# Altium PCB CBCM test PCB.PcbDoc
Units mm, origin at the board's own origin, x right, y up, seen from the top; angles counter-clockwise.
Board outline 163.32 x 88.65 mm, 4 copper layers (Top Layer, Power, Ground, Bottom Layer), stack 0.778 mm thick; 99 components, 88 nets, 492 pads, 98 vias.
Unrouted connection lines stored in the file: 4.
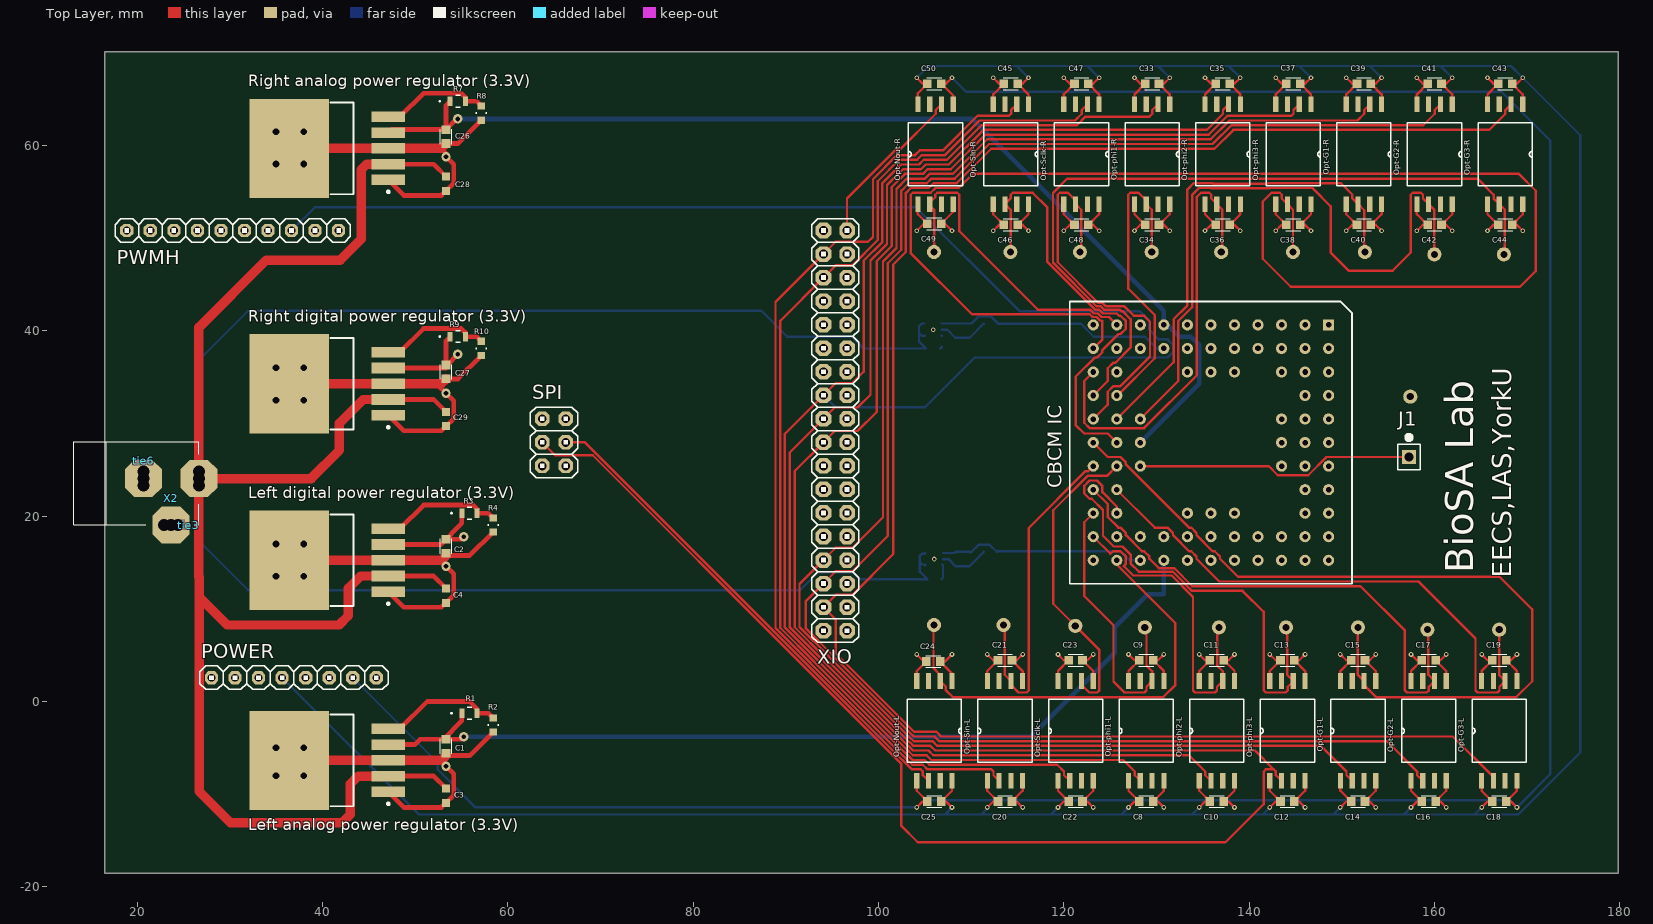
[diagram p0: Top Layer view]
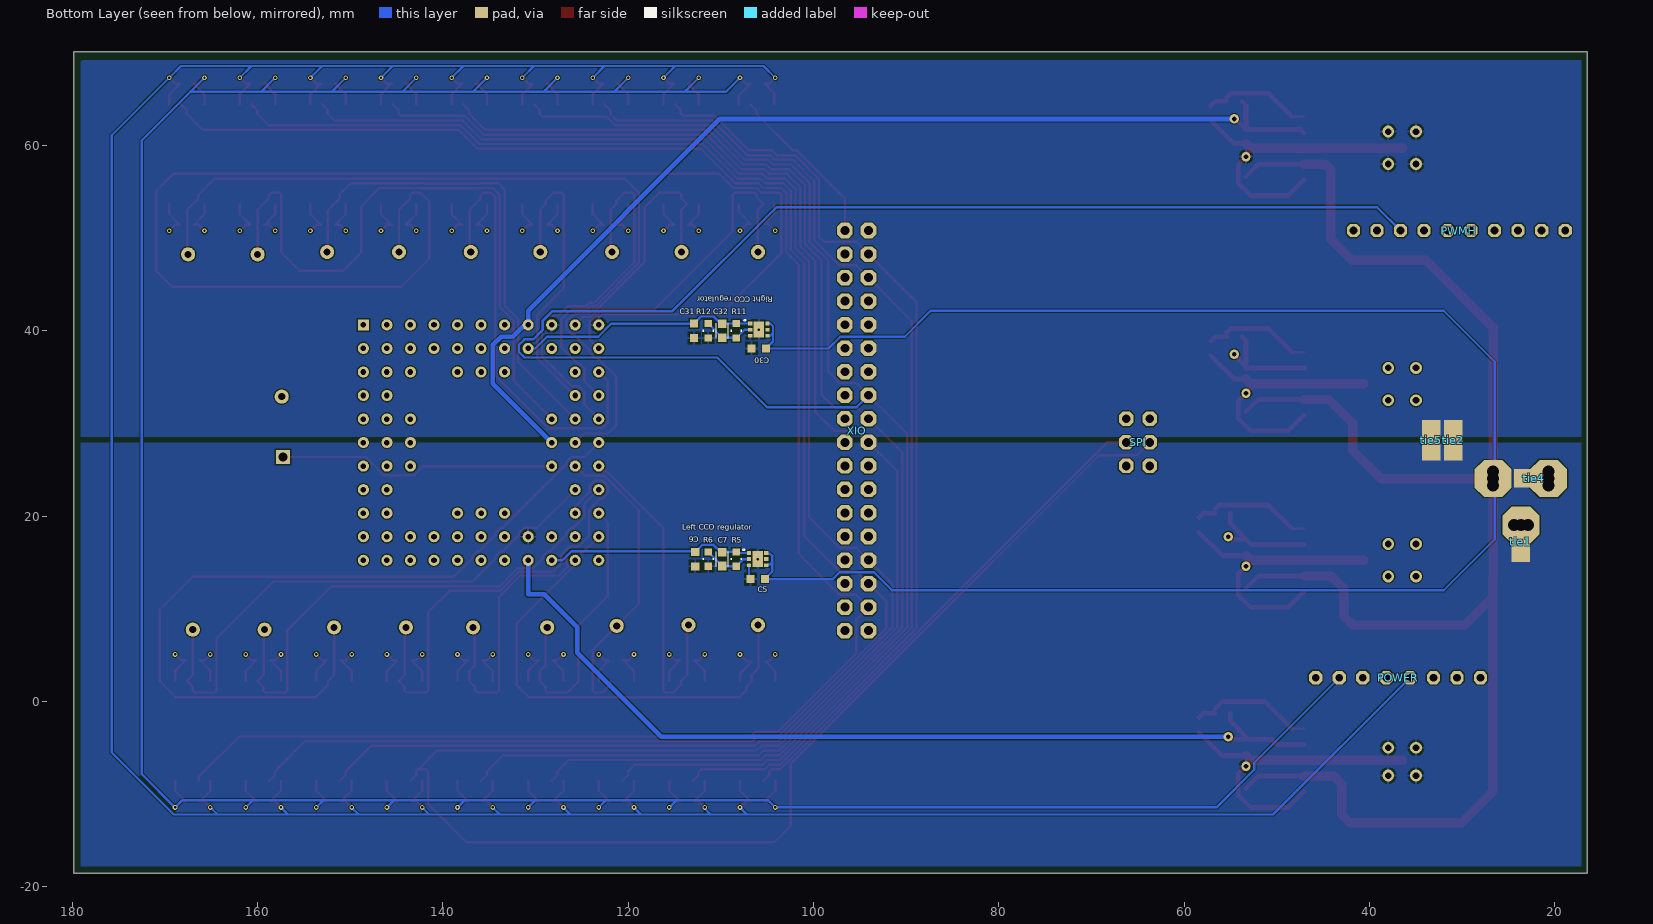
[diagram p1: Bottom Layer view, seen from below]
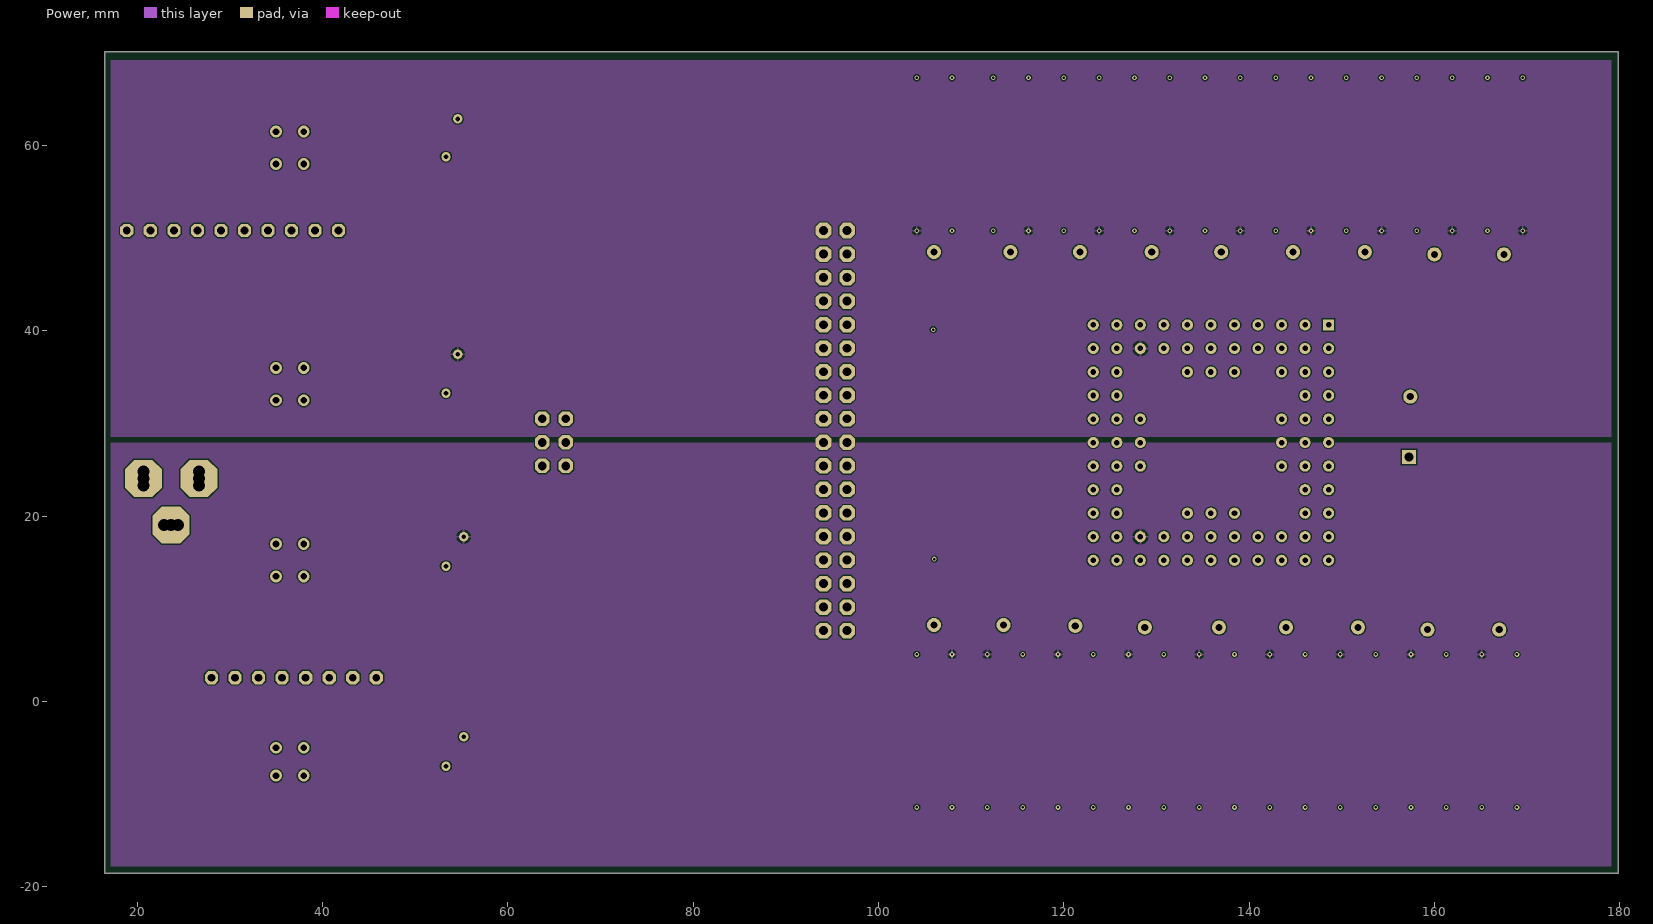
[diagram p2: Power]
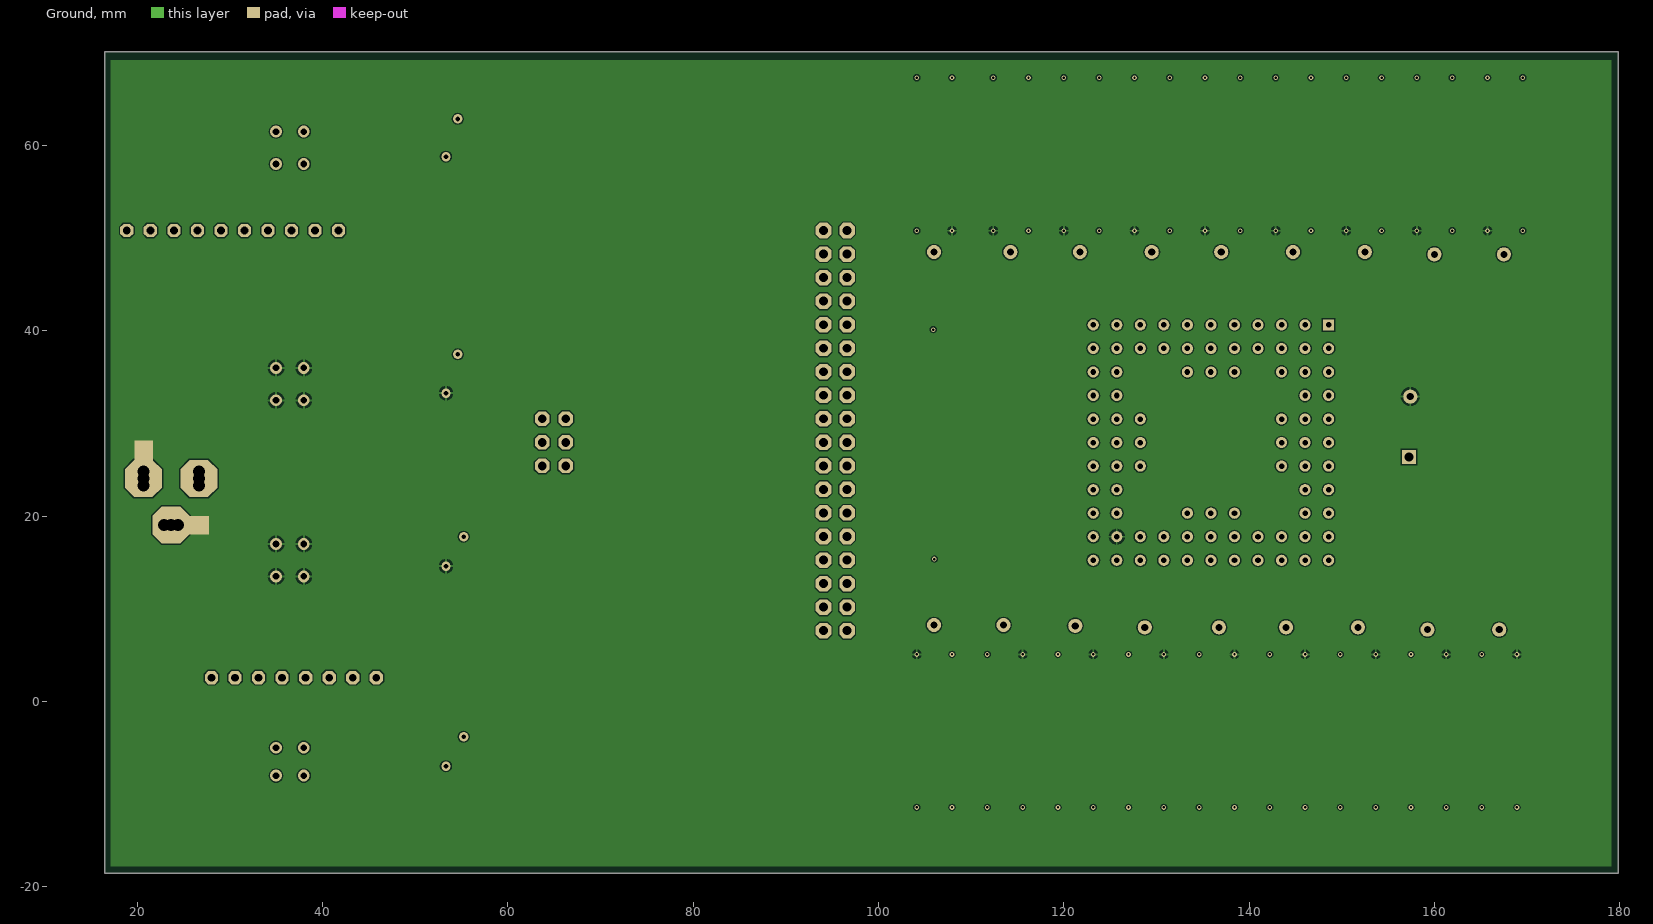
[diagram p3: Ground]

## Layer stack, top to bottom
Top Solder: solder mask 0.0102, Solder Resist, Dk 3.5
Top Layer: signal copper 0.0356
Dielectric 1: core 0.254, FR-4, Dk 4.2
Power: signal copper 0.036
Dielectric 3: prepreg 0.127, Dk 4.2
Ground: signal copper 0.036
Dielectric 2: core 0.254, FR-4, Dk 4.2
Bottom Layer: signal copper 0.0356
Bottom Solder: solder mask 0.0102, Solder Resist, Dk 3.5

## Board outline
16.51,-18.542 16.51,70.104 179.832,70.104 179.832,-18.542

## Design rules (kind name [scope] priority, off if disabled: settings)
Clearance [All] p1: gap=0.127
ComponentClearance [All] p1: gap=0.127 collisioncheckmode=3 verticalgap=0.127 showdistances=FALSE
PolygonConnect [All] p1: connectstyle=Relief reliefconductorwidth=0.254 reliefentries=4 polygonreliefangle="90 Angle" airgapwidth=0.254
RoutingVias [All] p1: holewidth=0.711 width=1.27 viastyle="Through Hole" minholewidth=0.127 minwidth=0.254 maxholewidth=0.711 maxwidth=1.27
SolderMaskExpansion [All] p1: expansion=0.102
Width [All] p1: maxlimit=5 minlimit=0.127 preferedwidth=0.254
28 further rules are at their usual default settings.

## Classes and differential pairs
component class "IC right": C26 C27 C28 C29 C30 C31 C32 C33 C34 C35 C36 C37 C38 C39 C40 C41 C42 C43 C44 C45 C46 C47 C48 C49 C50 Opt-G1-R Opt-G2-R Opt-G3-R Opt-Nout-R Opt-phi1-R Opt-phi2-R Opt-phi3-R Opt-Sclk-R Opt-Sin-R R7 R8 R9 R10 R11 R12 "Right analog power regulator (3.3V)" "Right CCO regulator" "Right digital power regulator (3.3V)"
component class "IC left": C1 C2 C3 C4 C5 C6 C7 C8 C9 C10 C11 C12 C13 C14 C15 C16 C17 C18 C19 C20 C21 C22 C23 C24 C25 "Left analog power regulator (3.3V)" "Left CCO regulator" "Left digital power regulator (3.3V)" Opt-G1-L Opt-G2-L Opt-G3-L Opt-Nout-L Opt-phi1-L Opt-phi2-L Opt-phi3-L Opt-Sclk-L Opt-Sin-L R1 R2 R3 R4 R5 R6
component class "IC common": "CBCM IC" J1 POWER PWMH SPI tie1 tie2 tie3 tie4 tie5 tie6 X2 XIO

## Components (designator, comment, footprint, x,y, rotation, side; value= is the part's Value field where it differs from the comment)
C1 "C" CAPC1608X9N 53.34,-4.826 r90 top
C2 "C" CAPC1608X9N 53.34,16.764 r90 top
C3 "C" CAP_GRM_188 53.34,-10.16 r90 top
C4 "C" CAP_GRM_188 53.34,11.43 r90 top
C5 "C" CAP_GRM_188 106.045,13.208 r180 bottom
C6 "C" CAP_GRM_188 112.776,15.367 r90 bottom
C7 "C" CAPC1608X9N 109.855,15.367 r270 bottom
C8 "C" CAPC1608X9N 128.905,-10.795 r0 top
C9 "C" CAPC1608X9N 128.905,4.445 r0 top
C10 "C" CAPC1608X9N 136.525,-10.795 r0 top
C11 "C" CAPC1608X9N 136.525,4.445 r0 top
C12 "C" CAPC1608X9N 144.145,-10.795 r0 top
C13 "C" CAPC1608X9N 144.145,4.445 r0 top
C14 "C" CAPC1608X9N 151.765,-10.795 r0 top
C15 "C" CAPC1608X9N 151.765,4.445 r0 top
C16 "C" CAPC1608X9N 159.385,-10.795 r0 top
C17 "C" CAPC1608X9N 159.385,4.445 r0 top
C18 "C" CAPC1608X9N 167.005,-10.795 r0 top
C19 "C" CAPC1608X9N 167.005,4.445 r0 top
C20 "C" CAPC1608X9N 113.665,-10.795 r0 top
C21 "C" CAPC1608X9N 113.665,4.445 r0 top
C22 "C" CAPC1608X9N 121.285,-10.795 r0 top
C23 "C" CAPC1608X9N 121.285,4.445 r0 top
C24 "C" CAPC1608X9N 105.918,4.318 r180 top
C25 "C" CAPC1608X9N 106.045,-10.795 r180 top
C26 "C" CAPC1608X9N 53.34,60.96 r90 top
C27 "C" CAPC1608X9N 53.34,35.56 r90 top
C28 "C" CAP_GRM_188 53.34,55.88 r90 top
C29 "C" CAP_GRM_188 53.34,30.48 r90 top
C30 "C" CAP_GRM_188 105.918,38.1 r180 bottom
C31 "C" CAP_GRM_188 112.903,40.005 r90 bottom
C32 "C" CAPC1608X9N 109.855,40.005 r270 bottom
C33 "C" CAPC1608X9N 129.54,66.675 r180 top
C34 "C" CAPC1608X9N 129.54,51.435 r180 top
C35 "C" CAPC1608X9N 137.16,66.675 r180 top
C36 "C" CAPC1608X9N 137.16,51.435 r180 top
C37 "C" CAPC1608X9N 144.78,66.675 r180 top
C38 "C" CAPC1608X9N 144.78,51.435 r180 top
C39 "C" CAPC1608X9N 152.4,66.675 r180 top
C40 "C" CAPC1608X9N 152.4,51.435 r180 top
C41 "C" CAPC1608X9N 160.02,66.675 r180 top
C42 "C" CAPC1608X9N 160.02,51.435 r180 top
C43 "C" CAPC1608X9N 167.64,66.675 r180 top
C44 "C" CAPC1608X9N 167.64,51.435 r180 top
C45 "C" CAPC1608X9N 114.3,66.675 r180 top
C46 "C" CAPC1608X9N 114.3,51.435 r180 top
C47 "C" CAPC1608X9N 121.92,66.675 r180 top
C48 "C" CAPC1608X9N 121.92,51.435 r180 top
C49 "C" CAPC1608X9N 106.045,51.562 r0 top
C50 "C" CAPC1608X9N 106.045,66.675 r0 top
"CBCM IC" "CBCM IC" PGA85x11 148.59,40.64 r270 top
J1 "87224-1" 87224-1 157.261,26.381 r0 top
"Left analog power regulator (3.3V)" "TPS75901KTTR" TO-263-5 40.64,-6.35 r180 top
"Left CCO regulator" "NCP705MTADJTCG" WDFN6 106.045,15.367 r270 bottom
"Left digital power regulator (3.3V)" "TPS75901KTTR" TO-263-5 40.64,15.24 r180 top
Opt-G1-L "ADUM210N1BRIZ" SOIC127P1150X330-8N 151.765,-3.175 r90 top
Opt-G1-R "ADUM210N1BRIZ" SOIC127P1150X330-8N 152.4,59.055 r270 top
Opt-G2-L "ADUM210N1BRIZ" SOIC127P1150X330-8N 159.385,-3.175 r90 top
Opt-G2-R "ADUM210N1BRIZ" SOIC127P1150X330-8N 160.02,59.055 r270 top
Opt-G3-L "ADUM210N1BRIZ" SOIC127P1150X330-8N 167.005,-3.175 r90 top
Opt-G3-R "ADUM210N1BRIZ" SOIC127P1150X330-8N 167.64,59.055 r270 top
Opt-Nout-L "ADUM210N1BRIZ" SOIC127P1150X330-8N 106.045,-3.175 r270 top
Opt-Nout-R "ADUM210N1BRIZ" SOIC127P1150X330-8N 106.172,59.055 r90 top
Opt-phi1-L "ADUM210N1BRIZ" SOIC127P1150X330-8N 128.905,-3.175 r90 top
Opt-phi1-R "ADUM210N1BRIZ" SOIC127P1150X330-8N 129.54,59.055 r270 top
Opt-phi2-L "ADUM210N1BRIZ" SOIC127P1150X330-8N 136.525,-3.175 r90 top
Opt-phi2-R "ADUM210N1BRIZ" SOIC127P1150X330-8N 137.16,59.055 r270 top
Opt-phi3-L "ADUM210N1BRIZ" SOIC127P1150X330-8N 144.145,-3.175 r90 top
Opt-phi3-R "ADUM210N1BRIZ" SOIC127P1150X330-8N 144.78,59.055 r270 top
Opt-Sclk-L "ADUM210N1BRIZ" SOIC127P1150X330-8N 121.285,-3.175 r90 top
Opt-Sclk-R "ADUM210N1BRIZ" SOIC127P1150X330-8N 121.92,59.055 r270 top
Opt-Sin-L "ADUM210N1BRIZ" SOIC127P1150X330-8N 113.665,-3.175 r90 top
Opt-Sin-R "ADUM210N1BRIZ" SOIC127P1150X330-8N 114.3,59.055 r270 top
POWER "8x1F-H8.5" 1X08 36.928,2.565 r0 bottom locked
PWMH "10x1F-H8.5" 1X10 30.324,50.825 r180 bottom locked
R1 "R" RES_0816 55.88,-1.27 r0 top
R2 "R" RC0603N 58.42,-2.54 r270 top
R3 "R" RES_0816 55.88,20.32 r0 top
R4 "R" RC0603N 58.42,19.05 r270 top
R5 "R" RC0603N 108.331,15.367 r270 bottom
R6 "R" RC0603N 111.379,15.367 r270 bottom
R7 "R" RES_0816 54.61,64.77 r0 top
R8 "R" RC0603N 57.15,63.5 r270 top
R9 "R" RES_0816 54.61,39.37 r0 top
R10 "R" RC0603N 57.15,38.1 r270 top
R11 "R" RC0603N 108.331,40.005 r270 bottom
R12 "R" RC0603N 111.379,40.005 r270 bottom
"Right analog power regulator (3.3V)" "TPS75901KTTR" TO-263-5 40.64,59.69 r180 top
"Right CCO regulator" "NCP705MTADJTCG" WDFN6 105.918,40.132 r270 bottom
"Right digital power regulator (3.3V)" "TPS75901KTTR" TO-263-5 40.64,34.29 r180 top
SPI "3x2M" 2X03 64.995,27.965 r270 bottom locked
tie1 "Net Tie" net_tie#1 23.673,16.916 r90 bottom net-tie
tie2 "Net Tie" net_tie#1 31,28.5 r270 bottom net-tie
tie3 "Net Tie" net_tie#2 25.9,19 r180 top net-tie
tie4 "Net Tie" net_tie#1 21.9,24.1 r0 bottom net-tie
tie5 "Net Tie" net_tie#1 33.325,27.889 r90 bottom net-tie
tie6 "Net Tie" net_tie#2 20.7,26.3 r270 top net-tie
X2 "*" POWERSUPPLY_DC-21MM 20.32,24.13 r90 top
XIO "18x2F-H8.5" 2X18 95.348,29.235 r270 bottom locked

## Footprints (in the part's own frame and the unit in brackets; to place one, negate y for a bottom-side part, rotate by r counter-clockwise, add the part's x,y. Pads: shape width x height; smd on the part's side, far side on the other; paste and mask are expansions set on the pad)
1X08 [mil]
  oct 56x56 hole 33.46: 1(-350,0) 2(-250,0) 3(-150,0) 4(-50,0) 5(50,0) 6(150,0) 7(250,0) 8(350,0)
1X10 [mil]
  oct 56x56 hole 33.46: 1(-450,0) 2(-350,0) 3(-250,0) 4(-150,0) 5(-50,0) 6(50,0) 7(150,0) 8(250,0) 9(350,0) 10(450,0)
2X03 [mm]
  oct 1.55x1.55 hole 0.95: 1(-2.54,1.27) 2(-2.54,-1.27) 3(0,1.27) 4(0,-1.27) 5(2.54,1.27) 6(2.54,-1.27)
2X18 [mil]
  oct 66x66 hole 37.4: 1(-850,50) 2(-850,-50) 3(-750,50) 4(-750,-50) 5(-650,50) 6(-650,-50) 7(-550,50) 8(-550,-50) 9(-450,50) 10(-450,-50) 11(-350,50) 12(-350,-50) 13(-250,50) 14(-250,-50) 15(-150,50) 16(-150,-50) 17(-50,50) 18(-50,-50) 19(50,50) 20(50,-50) 21(150,50) 22(150,-50) 23(250,50) 24(250,-50) 25(350,50) 26(350,-50) 27(450,50) 28(450,-50) 29(550,50) 30(550,-50) 31(650,50) 32(650,-50) 33(750,50) 34(750,-50) 35(850,50) 36(850,-50)
87224-1 [mil]
  rect 60x60 hole 38 mask+0: 1(0,0)
  silkscreen extent -47,-55 47,93, body extent 0,0 10,10, height 10
CAP_GRM_188 [mil]
  rect 34x35 smd paste+0 mask+0: 1(-30.5,0) 2(30.5,0)
  body extent 0,0 10,10, height 10
CAPC1608X9N [mm]
  rect 0.93x0.93 smd: 1(-0.75,0) 2(0.75,0)
  silkscreen extent -0.8,-0.64 0.8,0.64
net_tie#1 [mm]
  rect 2.2x2 smd mask+0: 0(-0.762,0) 1(1.397,0)
net_tie#2 [mm]
  rect 2.2x2 on Mid2 mask+0: 0(-0.762,0) 1(1.397,0)
PGA85x11 [mm]
  rect 1.2x1.2 hole 0.6: A1(0,0)
  round 1.2 hole 0.6: A2(2.54,0) A3(5.08,0) A4(7.62,0) A5(10.16,0) A6(12.7,0) A7(15.24,0) A8(17.78,0) A9(20.32,0) A10(22.86,0) A11(25.4,0) B1(0,-2.54) B2(2.54,-2.54) B3(5.08,-2.54) B4(7.62,-2.54) B5(10.16,-2.54) B6(12.7,-2.54) B7(15.24,-2.54) B8(17.78,-2.54) B9(20.32,-2.54) B10(22.86,-2.54) B11(25.4,-2.54) C1(0,-5.08) C2(2.54,-5.08) C3(5.08,-5.08) C5(10.16,-5.08) C6(12.7,-5.08) C7(15.24,-5.08) C10(22.86,-5.08) C11(25.4,-5.08) D1(0,-7.62) D2(2.54,-7.62) D10(22.86,-7.62) D11(25.4,-7.62) E1(0,-10.16) E2(2.54,-10.16) E3(5.08,-10.16) E9(20.32,-10.16) E10(22.86,-10.16) E11(25.4,-10.16) F1(0,-12.7) F2(2.54,-12.7) F3(5.08,-12.7) F9(20.32,-12.7) F10(22.86,-12.7) F11(25.4,-12.7) G1(0,-15.24) G2(2.54,-15.24) G3(5.08,-15.24) G9(20.32,-15.24) G10(22.86,-15.24) G11(25.4,-15.24) H1(0,-17.78) H2(2.54,-17.78) H10(22.86,-17.78) H11(25.4,-17.78) J1(0,-20.32) J2(2.54,-20.32) J5(10.16,-20.32) J6(12.7,-20.32) J7(15.24,-20.32) J10(22.86,-20.32) J11(25.4,-20.32) K1(0,-22.86) K2(2.54,-22.86) K3(5.08,-22.86) K4(7.62,-22.86) K5(10.16,-22.86) K6(12.7,-22.86) K7(15.24,-22.86) K8(17.78,-22.86) K9(20.32,-22.86) K10(22.86,-22.86) K11(25.4,-22.86) L1(0,-25.4) L2(2.54,-25.4) L3(5.08,-25.4) L4(7.62,-25.4) L5(10.16,-25.4) L6(12.7,-25.4) L7(15.24,-25.4) L8(17.78,-25.4) L9(20.32,-25.4) L10(22.86,-25.4) L11(25.4,-25.4)
  silkscreen extent -2.54,-27.94 27.94,2.54
POWERSUPPLY_DC-21MM [mm]
  oct 4x4 hole 1.3: 1(-5.08,-3.353) 2(-0.076,-6.35) 3(-0.076,-0.356)
  round 1.95 hole 1.3: 4(-5.08,-4.115) 5(-5.08,-2.591) 6(-0.838,-0.356) 7(0.686,-0.356) 8(-0.838,-6.35) 9(0.686,-6.35)
  silkscreen extent -5.08,-6.35 3.91,7.14
RC0603N [mil]
  rect 30x32 smd paste+0 mask+0: 1(-30.5,0) 2(30.5,0)
  silkscreen extent -3,-21 3,21, body extent 0,0 10,10, height 10
RES_0816 [mm]
  rect 0.553x1 smd paste+0 mask+0: 1(-0.827,0) 2(0.827,0)
  silkscreen extent -2.02,-0.63 0.24,0.63, body extent 0,0 0.25,0.25, height 0.25
SOIC127P1150X330-8N [mil]
  rect 67x22 smd: 1(-212,75) 2(-212,25) 3(-212,-25) 4(-212,-75) 5(212,-75) 6(212,-25) 7(212,25) 8(212,75)
  silkscreen extent -134,-115 134,115
TO-263-5 [mm] "D2-PAK, 6-Pads, Body 8,9x9,9mm (max), IPC Low Density"
  rect 3.6x1.15 smd: 1(-6.45,3.4) 2(-6.45,1.7) 3(-6.45,0) 4(-6.45,-1.7) 5(-6.45,-3.4)
  rect 8.6x10.7 smd paste-5: 6(4.2,0)
  silkscreen extent -6.6,-4.95 -0.25,4.95, body extent -7.31,-5.08 7.33,5.08, height 4.57
WDFN6 [mm]
  rect 0.4x0.45 smd: 1(-0.66,-0.925) 2(0,-0.925) 3(0.66,-0.925) 4(0.66,0.925) 5(0,0.925) 6(-0.66,0.925)
  rect 1.72x1.12 smd: GND(0,0)
  silkscreen extent -1.1,-1.6 -0.9,-1.4

## Part data
C1 C2 C26 C27: library part GRM188R60G476ME15D, "Multilayer Ceramic Capacitors - 47uF 4V X5R 20% Pad SMD 0603 85C T/R"
C3 C4 C5 C6 C28 C29 C30 C31: library part GRM188R60J105KA0, "Imported"
C7 C8 C9 C10 C11 C12 C13 C14 C15 C16 C17 C18 C19 C20 C21 C22 C23 C24 C25 C32 C33 C34 C35 C36 C37 C38 C39 C40 C41 C42 C43 C44 C45 C46 C47 C48 C49 C50: library part GRM1885C1H103JA01D, "Multilayer Ceramic Capacitor, GRM Series, 0.01 F, 5%, C0G / NP0, 50 V, 0603 [1608 Metric]"
J1 "Left analog power regulator (3.3V)" "Left digital power regulator (3.3V)" "Right analog power regulator (3.3V)" "Right digital power regulator (3.3V)": "Imported"
"Left CCO regulator" "Right CCO regulator": "500 mA, Ultra-Low  Quiescent Current, IQ 13 A,  Ultra-Low Noise, LDO  Voltage Regulator"
Opt-G1-L Opt-G1-R Opt-G2-L Opt-G2-R Opt-G3-L Opt-G3-R Opt-Nout-L Opt-Nout-R Opt-phi1-L Opt-phi1-R Opt-phi2-L Opt-phi2-R Opt-phi3-L Opt-phi3-R Opt-Sclk-L Opt-Sclk-R Opt-Sin-L Opt-Sin-R: "Digital isolator 1-CH 8-Pin SOIC T/R"
POWER: library part PINHD-1X8
PWMH: library part PINHD-1X10
R1 R3 R7 R9: library part RR0816P-513-D, "Imported"
R2 R4 R8 R10: library part RT0603BRD0730K1L, "Imported"
R5 R11: library part RC0603FR-07130KL, "Imported"
R6 R12: library part ERJ-3GEY0R00V, "Imported"
SPI: library part PINHD-2X3
X2: library part POWERSUPPLY_DC21MMX
XIO: library part PINHD-2X18

## Free pads (board coordinates)
  round 1.524 hole 0.762: 0(106,8.25) 1(113.5,8.25) 2(121.25,8.163) 3(128.75,8) 4(136.75,8) 5(144,8) 6(151.75,8) 7(159.25,7.75) 8(167,7.75) 9(106,48.5) 10(114.25,48.5) 11(121.75,48.5) 12(129.5,48.5) 13(137,48.5) 14(144.75,48.5) 15(152.5,48.5) 16(160,48.25) 17(167.5,48.25) 25(157.4,32.9)

## Via types
v1: diameter 0.508, hole 0.254, Top Layer to Bottom Layer, tented top, 72 vias
v2: diameter 1.27, hole 0.711, Top Layer to Bottom Layer, 16 vias
v3: diameter 1.016, hole 0.508, Top Layer to Bottom Layer, tented top, 8 vias
v4: diameter 0.508, hole 0.254, Top Layer to Bottom Layer, 2 vias

## Nets (pads, with @x,y where several pads share a name; then routed paths per layer and width w, separated by ;. In a path a pad name is that pad's centre, name@x,y a point inside that pad or via, vN(x,y) a via of type N, cw(c..) or ccw(c..) an arc to the next point about the centre after c; other vN are vias at no path point)
+5: "Left analog power regulator (3.3V).2" "Left CCO regulator.4" "Left CCO regulator.6" "Left digital power regulator (3.3V).2" "Right analog power regulator (3.3V).2" "Right CCO regulator.4" "Right CCO regulator.6" "Right digital power regulator (3.3V).2" C3.2 C4.2 C5.2 C28.2 C29.2 C30.2 X2.2 X2.8 X2.9 | length 380.8
  Top Layer w0.508: 47.09,-8.05 52.005,-8.05 C3.2 ; 47.09,13.54 52.005,13.54 C4.2 ; 47.09,32.59 52.005,32.59 C29.2 ; 47.09,57.99 52.005,57.99 C28.2
  Top Layer w1.016: 47.09,-8.05 43.85,-8.05 43,-8.9 43,-12.2 42.119,-13.081 30.081,-13.081 26.692,-9.692 26.692,13.44 ; 47.09,13.54 44.14,13.54 42.8,12.2 42.8,9.25 41.805,8.255 29.745,8.255 26.692,11.308 26.692,13.44 ; 47.09,32.59 44.401,32.59 41.843,30.032 41.843,27.111 38.786,24.054 X2.2 ; 47.09,57.99 44.782,57.99 44.196,57.404 44.196,49.911 41.91,47.625 33.925,47.625 26.67,40.37 X2.9 X2.2 ; X2.2 X2.8 26.67,13.462 26.692,13.44
  Bottom Layer w0.254: X2.9@26.5,25.039 26.5,36.66 32.004,42.164 87.376,42.164 90.17,39.37 97.119,39.37 98.389,38.1 C30.2 104.387,38.856 104.387,39.758 ; X2.9 26.5,24.646 26.5,17.5 32,12 91.556,12 93.501,13.945 97.195,13.945 97.931,13.208 C5.2 104.478,14 104.478,15.009 ; 104.977,40.792 104.689,40.792 104.387,40.49 104.387,39.758 ; 104.993,39.472 104.673,39.472 104.387,39.758 ; 105.068,14.707 104.989,14.786 104.701,14.786 104.478,15.009 ; 105.068,16.027 104.989,15.948 104.701,15.948 104.478,15.725 104.478,15.009
D_GND: "CBCM IC.K10" "Left digital power regulator (3.3V).1" "Left digital power regulator (3.3V).3" "Left digital power regulator (3.3V).6" "Right digital power regulator (3.3V).1" "Right digital power regulator (3.3V).3" "Right digital power regulator (3.3V).6" C2.1 C4.1 C9.2 C11.2 C13.2 C15.2 C17.2 C19.2 C21.2 C23.2 C24.2 C27.1 C29.1 C34.2 C36.2 C38.2 C40.2 C42.2 C44.2 C46.2 C48.2 C49.2 Opt-G1-L.5 Opt-G1-R.5 Opt-G2-L.5 Opt-G2-R.5 Opt-G3-L.5 Opt-G3-R.5 Opt-Nout-L.4 Opt-Nout-R.4 Opt-phi1-L.5 Opt-phi1-R.5 Opt-phi2-L.5 Opt-phi2-R.5 Opt-phi3-L.5 Opt-phi3-R.5 Opt-Sclk-L.5 Opt-Sclk-R.5 Opt-Sin-L.5 Opt-Sin-R.5 pad.25 R4.2 R10.2 tie3.0 tie6.0 | length 135.8
  Top Layer w0.254: Opt-Nout-L.4 104.14,3.29 C24.2 104.902,4.318 v1(104.14,5.08) ; v1(107.95,50.8) 107.188,51.562 C49.2 108.077,52.844 Opt-Nout-R.4 ; v1(112.395,50.8) 113.03,51.435 C46.2 112.395,52.59 Opt-Sin-R.5 ; Opt-Sin-L.5 115.57,3.29 C21.2 114.935,4.445 v1(115.57,5.08) ; v1(120.015,50.8) 120.65,51.435 C48.2 120.015,52.59 Opt-Sclk-R.5 ; Opt-Sclk-L.5 123.19,3.29 C23.2 122.555,4.445 v1(123.19,5.08) ; v1(127.635,50.8) 128.27,51.435 C34.2 127.635,52.59 Opt-phi1-R.5 ; Opt-phi1-L.5 130.81,3.29 C9.2 130.175,4.445 v1(130.81,5.08) ; v1(135.255,50.8) 135.89,51.435 C36.2 135.255,52.59 Opt-phi2-R.5 ; C11.2 C11.2@137.312,4.445 ; Opt-phi2-L.5 138.43,3.327 C11.2@137.312,4.445 ; v1(138.43,5.08) 137.795,4.445 C11.2@137.312,4.445 ; v1(142.875,50.8) 143.51,51.435 C38.2 142.875,52.59 Opt-phi3-R.5 ; Opt-phi3-L.5 146.05,3.29 C13.2 145.415,4.445 v1(146.05,5.08) ; v1(150.495,50.8) 151.13,51.435 C40.2 150.495,52.59 Opt-G1-R.5 ; Opt-G1-L.5 153.67,3.29 C15.2 153.035,4.445 v1(153.67,5.08) ; v1(158.115,50.8) 158.75,51.435 C42.2 158.115,52.59 Opt-G2-R.5 ; Opt-G2-L.5 161.29,3.29 C17.2 160.655,4.445 v1(161.29,5.08) ; v1(165.735,50.8) 166.37,51.435 C44.2 165.735,52.59 Opt-G3-R.5 ; Opt-G3-L.5 168.91,3.29 C19.2 168.275,4.445 v1(168.91,5.08)
  Top Layer w0.508: 47.09,11.84 48.77,10.16 52.845,10.16 C4.1 54.165,11.481 54.165,13.779 v3(53.34,14.605) ; 47.09,30.89 48.77,29.21 52.845,29.21 C29.1 54.165,30.531 54.165,32.448 v3(53.34,33.274) 52.578,34.036 ; 52.82,15.24 53.201,14.859 v3@53.34,14.859 ; C2.1@53.34,15.76 55.905,15.76 R4.2 ; C27.1 54.635,34.81 R10.2
  Top Layer w1: 50.292,15.24 52.82,15.24 C2.1@53.34,15.76
  Top Layer w1.016: 40.64,15.24 50.292,15.24 ; 40.64,34.29 52.82,34.29 C27.1
  other v2: 35,13.5 38,13.5 35,17 38,17 35,32.5 38,32.5 35,36 38,36
G1: Opt-G1-L.2 Opt-G1-R.2 XIO.29 | length 174.5
  Top Layer w0.254: Opt-G1-L.2 150.52,-7.95 150.52,-7.551 147.757,-4.788 106.348,-4.788 105.84,-4.28 103.81,-4.28 103.556,-4.026 103.532,-4.026 94.637,4.87 94.637,4.893 91.482,8.048 91.482,12.669 XIO.29 95.399,16.586 97.195,16.586 100.497,19.888 100.497,47.495 101.956,48.953 101.956,55.31 103.072,56.426 105.02,56.426 105.528,56.934 108.024,56.934 111.758,60.668 135.859,60.668 137.891,62.7 151.694,62.7 152.425,63.431 152.425,63.83 Opt-G1-R.2
G1-L: "CBCM IC.L6" Opt-G1-L.6 pad.6 | length 88.9
  Top Layer w0.254: 123.19,27.94 124.749,26.381 126.136,26.381 126.711,25.806 126.711,25.572 133.522,18.761 133.756,18.761 134.331,18.186 134.331,17.952 136.062,16.221 136.296,16.221 136.871,15.646 136.871,15.412 138.821,13.462 167.038,13.462 170.561,9.939 170.561,2.192 168.839,0.47 153.708,0.47 152.4,1.778 Opt-G1-L.6 151.75,2.86 pad.6
G1-R: "CBCM IC.K5" Opt-G1-R.6 pad.15 | length 53.3
  Top Layer w0.254: 125.73,30.48 131.861,36.611 131.861,41.257 133.35,42.746 133.35,55.245 134.023,55.918 136.113,55.918 136.151,55.88 141.979,55.88 142.017,55.918 149.916,55.918 151.155,54.679 151.155,54.28 Opt-G1-R.6 152.431,53.004 152.431,48.569 pad.15
G2: Opt-G2-L.2 Opt-G2-R.2 XIO.31 | length 188.5
  Top Layer w0.254: Opt-G2-L.2 158.14,-7.95 158.14,-7.551 154.869,-4.28 106.558,-4.28 106.05,-3.772 103.84,-3.772 103.713,-3.645 103.69,-3.645 95.018,5.028 95.018,5.051 92.147,7.921 92.147,10.795 XIO.31 95.399,14.046 97.195,14.046 101.023,17.874 101.023,47.302 102.464,48.743 102.464,55.1 103.282,55.918 105.231,55.918 105.739,56.426 108.235,56.426 111.968,60.16 136.069,60.16 138.101,62.192 158.806,62.192 160.045,63.431 160.045,63.83 Opt-G2-R.2
G2-L: "CBCM IC.L8" Opt-G2-L.6 pad.7 | length 57.4
  Top Layer w0.254: 123.19,22.86 124.749,21.301 124.749,19.914 125.902,18.761 126.136,18.761 126.711,18.186 126.711,17.952 128.442,16.221 128.676,16.221 129.251,15.646 129.251,15.412 130.277,14.386 131.942,14.386 133.882,12.446 152.019,12.446 156.82,7.645 156.82,1.201 157.043,0.978 159.187,0.978 159.41,1.201 159.41,1.6 Opt-G2-L.6 159.354,2.876 159.354,7.646 pad.7
G2-R: "CBCM IC.J5" Opt-G2-R.6 pad.16 | length 72.5
  Top Layer w0.254: 128.27,30.48 132.369,34.579 132.369,41.046 133.858,42.535 133.858,54.661 134.607,55.41 135.903,55.41 135.941,55.372 142.189,55.372 142.227,55.41 146.84,55.41 148.806,53.444 148.806,48.444 150.75,46.5 155.5,46.5 157.455,48.455 157.455,54.679 157.678,54.902 158.552,54.902 158.775,54.679 158.775,54.28 Opt-G2-R.6 160,53.055 pad.16
G3: Opt-G3-L.2 Opt-G3-R.2 XIO.33 | length 201.4
  Top Layer w0.254: Opt-G3-L.2 166.37,-8.161 161.981,-3.772 106.769,-3.772 106.261,-3.264 103.848,-3.264 95.399,5.185 95.399,8.865 XIO.33 95.399,11.506 97.195,11.506 101.6,15.911 101.6,47.161 102.972,48.533 102.972,54.889 103.492,55.41 105.441,55.41 105.949,55.918 108.445,55.918 112.179,59.652 136.28,59.652 138.312,61.684 165.918,61.684 167.665,63.431 167.665,63.83 Opt-G3-R.2
G3-L: "CBCM IC.K8" Opt-G3-L.6 pad.8 | length 61.1
  Top Layer w0.254: 125.73,22.86 129.829,18.761 131.216,18.761 131.791,18.186 131.791,17.952 133.522,16.221 133.756,16.221 134.331,15.646 134.331,15.412 136.789,12.954 158.296,12.954 164.44,6.81 164.44,1.201 164.663,0.978 166.807,0.978 167.03,1.201 167.03,1.6 Opt-G3-L.6 167,2.85 pad.8
G3-R: "CBCM IC.L4" Opt-G3-R.6 pad.17 | length 84.4
  Top Layer w0.254: 123.19,33.02 124.749,34.579 124.749,35.966 125.324,36.541 125.558,36.541 127.219,38.202 127.219,41.257 126.347,42.129 126.19,42.129 126.063,42.256 124.398,42.256 124.017,42.637 123.574,42.637 118.847,47.365 118.847,54.889 120.383,56.426 164.648,56.426 166.395,54.679 166.395,54.28 Opt-G3-R.6 167.609,53.066 167.609,48.359 pad.17
LA_3.3: "CBCM IC.H11" "Left analog power regulator (3.3V).4" C1.2 R1.1 | length 99.1
  Top Layer w0.508: 47.09,-4.65 49.96,-4.65 50.546,-4.064 53.086,-4.064 55.053,-2.097 R1.1 ; C1.2 54.979,-4.076 v3(55.245,-3.81)
  Bottom Layer w0.508: v3(55.245,-3.81) 116.44,-3.81 125.5,5.25 125.5,8 129.06,11.56 130.81,11.56 130.81,15.24
LA_GND: "CBCM IC.H10" "Left analog power regulator (3.3V).1" "Left analog power regulator (3.3V).3" "Left analog power regulator (3.3V).6" "Left CCO regulator.3" "Left CCO regulator.GND" C1.1 C3.1 C5.1 C6.1 R2.2 R6.2 tie1.0 tie2.1 tie4.1 tie5.0 | length 37.5
  Top Layer w0.254: v3(53.34,-6.985) v3@53.34,-6.87
  Top Layer w0.508: 47.09,-9.75 48.77,-11.43 52.845,-11.43 C3.1 54.165,-10.109 54.165,-7.81 v3(53.34,-6.985) ; 52.82,-6.35 v3@53.34,-6.87 ; C1.1@53.34,-5.83 55.905,-5.83 R2.2
  Top Layer w1: 36.44,-6.35 52.82,-6.35 C1.1@53.34,-5.83
  Bottom Layer w0.254: C5.1 106.97,13.358 106.97,14.707 106.891,14.786
  other v2: 35,-8 38,-8 35,-5 38,-5
  other v4: 106.045,15.367
LCCO_1.85V: "CBCM IC.J11" "Left CCO regulator.1" C6.2 C7.1 R5.1 | length 22.4
  Bottom Layer w0.254: 106.97,16.027 108.216,16.027 R5.1 109.83,16.142 C7.1 110.028,16.117 110.815,16.904 112.027,16.904 C6.2@112.776,16.154 ; C6.2 112.855,16.221 126.136,16.221 127.117,15.24 128.27,15.24
LD_3.3: "CBCM IC.J10" "Left digital power regulator (3.3V).4" C2.2 C9.1 C11.1 C13.1 C15.1 C17.1 C19.1 C21.1 C23.1 C24.1 Opt-G1-L.8 Opt-G2-L.8 Opt-G3-L.8 Opt-Nout-L.1 Opt-phi1-L.8 Opt-phi2-L.8 Opt-phi3-L.8 Opt-Sclk-L.8 Opt-Sin-L.8 R3.1 | length 49.3
  Top Layer w0.254: Opt-Nout-L.1 107.95,3.036 C24.1 107.188,4.318 v1(107.95,5.08) ; Opt-Sin-L.8 111.76,3.29 C21.1 112.395,4.445 v1(111.76,5.08) ; Opt-Sclk-L.8 119.38,3.29 C23.1 120.015,4.445 v1(119.38,5.08) ; Opt-phi1-L.8 127,3.29 C9.1 127.635,4.445 v1(127,5.08) ; Opt-phi2-L.8 134.62,3.29 C11.1 135.255,4.445 v1(134.62,5.08) ; Opt-phi3-L.8 142.24,3.29 C13.1 142.875,4.445 v1(142.24,5.08) ; Opt-G1-L.8 149.86,3.29 C15.1 150.495,4.445 v1(149.86,5.08) ; Opt-G2-L.8 157.48,3.29 C17.1 158.115,4.445 v1(157.48,5.08) ; Opt-G3-L.8 165.1,3.29 C19.1 165.735,4.445 v1(165.1,5.08)
  Top Layer w0.508: 47.09,16.94 52.754,16.94 55.053,19.239 R3.1 ; C2.2 54.979,17.514 v3(55.245,17.78)
NetC7_2: "Left CCO regulator.2" C7.2 R5.2 R6.1 | length 5.4
  Bottom Layer w0.254: 106.97,15.367 107.556,15.367 R5.2 109.83,14.592 R6.1
NetC32_2: "Right CCO regulator.2" C32.2 R11.2 R12.1 | length 5.5
  Bottom Layer w0.254: 106.843,40.132 107.429,40.132 108.306,39.255 C32.2 R12.1
"NetCBCM IC_33": "CBCM IC.J7" J1.1 | length 30.2
  Top Layer w0.254: 128.27,25.4 142.123,25.4 143.104,24.419 146.401,24.419 148.363,26.381 J1.1
"NetLeft analog power regulator (3.3V)_5": "Left analog power regulator (3.3V).5" R1.2 R2.1 | length 13.5
  Top Layer w0.254: 47.09,-2.95 48.358,-2.95 ; R1.2 R1.2@56.707,-0.827
  Top Layer w0.508: 48.358,-2.95 51.308,0 55.88,0 R1.2@56.707,-0.827 ; R1.2 57.925,-1.27 R2.1
"NetLeft digital power regulator (3.3V)_5": "Left digital power regulator (3.3V).5" R3.2 R4.1 | length 13.2
  Top Layer w0.254: 47.09,18.64 48.358,18.64 ; R3.2 R3.2@56.707,20.763
  Top Layer w0.508: 48.358,18.64 50.919,21.201 56.269,21.201 R3.2@56.707,20.763 ; R3.2 57.925,20.32 R4.1
NetPOWER_1: POWER.1
NetPOWER_2: POWER.2
NetPOWER_3: POWER.3
NetPOWER_5: POWER.5
NetPOWER_8: POWER.8
NetPWMH_1: PWMH.1
NetPWMH_2: PWMH.2
NetPWMH_4: PWMH.4
NetPWMH_5: PWMH.5
NetPWMH_6: PWMH.6
NetPWMH_7: PWMH.7
NetPWMH_8: PWMH.8
NetPWMH_9: PWMH.9
NetPWMH_10: PWMH.10
NetR7_2: "Right analog power regulator (3.3V).5" R7.2 R8.1 | length 12
  Top Layer w0.254: 47.09,63.09 48.358,63.09 ; R7.2 R7.2@55.437,65.213
  Top Layer w0.508: 48.358,63.09 50.919,65.651 54.999,65.651 R7.2@55.437,65.213 ; R7.2 56.655,64.77 R8.1
NetR9_2: "Right digital power regulator (3.3V).5" R9.2 R10.1 | length 12
  Top Layer w0.254: 47.09,37.69 48.358,37.69 ; R9.2 R9.2@55.437,39.813
  Top Layer w0.508: 48.358,37.69 50.919,40.251 54.999,40.251 R9.2@55.437,39.813 ; R9.2 56.655,39.37 R10.1
Nettie1_1: tie1.1 tie3.1 X2.1 X2.4 X2.5
Nettie4_0: tie4.0 tie6.1 X2.3 X2.6 X2.7
NetXIO_1: XIO.1
NetXIO_4: XIO.4
NetXIO_6: XIO.6
NetXIO_7: XIO.7
NetXIO_8: XIO.8
NetXIO_9: XIO.9
NetXIO_10: XIO.10
NetXIO_11: XIO.11
NetXIO_12: XIO.12
NetXIO_13: XIO.13
NetXIO_14: XIO.14
NetXIO_16: XIO.16
NetXIO_18: XIO.18
NetXIO_20: XIO.20
NetXIO_21: XIO.21
NetXIO_22: XIO.22
NetXIO_23: XIO.23
NetXIO_24: XIO.24
NetXIO_25: XIO.25
NetXIO_26: XIO.26
NetXIO_27: XIO.27
NetXIO_28: XIO.28
NetXIO_30: XIO.30
NetXIO_32: XIO.32
NetXIO_34: XIO.34
NOUT: Opt-Nout-L.6 SPI.4 | length 54.5
  Top Layer w0.254: SPI.4 68.331,27.965 92.351,3.946 92.351,3.923 102.585,-6.312 102.609,-6.312 103.625,-7.328 104.577,-7.328 104.8,-7.551 104.8,-7.95 Opt-Nout-L.6
NOUT-L: "CBCM IC.K11" Opt-Nout-L.2 pad.0 | length 49.3
  Top Layer w0.254: pad.0 105.949,8.199 105.949,3.599 106.68,2.868 Opt-Nout-L.2 107.29,1.6 107.29,1.201 108.021,0.47 130.739,0.47 132.055,1.785 132.055,8.445 125.73,14.77 125.73,15.24
NOUT-R: "CBCM IC.K1" Opt-Nout-R.2 pad.9 | length 34.6
  Top Layer w0.254: pad.9 106.014,48.514 106.014,53.066 105.41,53.67 106.147,54.407 106.147,54.679 106.37,54.902 108.514,54.902 108.737,54.679 108.737,50.763 117.209,42.291 122.843,42.291 123.259,41.875 123.702,41.875 124.083,41.494 124.876,41.494 125.73,40.64
NOUT_TEST: Opt-Nout-R.6 XIO.2 | length 18.1
  Top Layer w0.254: XIO.2 96.618,54.283 101.809,59.474 102.24,59.474 106.197,63.431 106.197,63.83 Opt-Nout-R.6
PHI1: Opt-phi1-L.2 Opt-phi1-R.2 PWMH.3 XIO.15 | length 276.7
  Top Layer w0.254: Opt-phi1-L.2 127.66,-7.95 127.66,-7.551 126.421,-6.312 105.716,-6.312 105.208,-5.804 103.717,-5.804 103.082,-5.169 103.059,-5.169 93.494,4.396 93.494,4.42 89.916,7.997 89.916,28.884 XIO.15 95.399,34.366 97.195,34.366 98.425,35.596 98.425,47.578 100.432,49.585 100.432,55.941 102.44,57.95 104.389,57.95 104.897,58.458 107.393,58.458 111.127,62.192 121.425,62.192 122.352,63.119 129.253,63.119 129.565,63.431 129.565,63.83 Opt-phi1-R.2
  Bottom Layer w0.254: PWMH.3 39.188,53.34 104.013,53.34 115.224,42.129 128.168,42.129 129.251,41.046 129.251,40.093 130.263,39.081 131.216,39.081 131.791,38.506 131.791,37.694 131.216,37.119 110.398,37.119 105.029,31.75 95.373,31.75 XIO.15
PHI1-L: "CBCM IC.L9" Opt-phi1-L.6 pad.3 | length 31.4
  Top Layer w0.254: 123.19,20.32 122.209,19.339 122.209,11.395 125.374,8.23 125.374,2.166 126.563,0.978 128.707,0.978 128.93,1.201 128.93,1.6 Opt-phi1-L.6 129.54,3.271 128.936,3.875 128.936,7.814 pad.3
PHI1-R: "CBCM IC.K4" Opt-phi1-R.6 pad.12 | length 32.8
  Top Layer w0.254: 125.73,33.02 125.813,33.02 129.829,37.036 129.829,41.704 126.975,44.559 126.975,54.679 127.198,54.902 128.072,54.902 128.905,54.069 Opt-phi1-R.6 129.509,53.066 129.509,48.509 pad.12
PHI2: Opt-phi2-L.2 Opt-phi2-R.2 XIO.17 | length 146.8
  Top Layer w0.254: Opt-phi2-L.2 135.28,-7.95 135.28,-7.551 133.533,-5.804 105.927,-5.804 105.419,-5.296 103.748,-5.296 103.24,-4.788 103.217,-4.788 93.875,4.554 93.875,4.577 90.424,8.028 90.424,26.852 XIO.17 95.297,31.725 97.765,31.725 99.143,33.103 99.143,47.578 100.94,49.374 100.94,55.731 102.651,57.442 104.599,57.442 105.107,57.95 107.603,57.95 111.337,61.684 135.438,61.684 137.185,63.431 137.185,63.83 Opt-phi2-R.2
PHI2-L: "CBCM IC.L10" Opt-phi2-L.6 pad.4 | length 34.9
  Top Layer w0.254: 123.19,17.78 125.036,15.934 125.324,16.221 126.136,16.221 126.711,15.646 126.711,14.834 126.489,14.611 127.506,13.594 131.656,13.594 133.96,11.29 133.96,1.201 134.183,0.978 136.327,0.978 136.55,1.201 136.55,1.6 Opt-phi2-L.6 137.16,3.271 136.556,3.875 136.556,7.806 pad.4
PHI2-R: "CBCM IC.L3" Opt-phi2-R.6 pad.13 | length 48.5
  Top Layer w0.254: 123.19,35.56 122.209,34.579 122.209,30.074 122.784,29.499 128.676,29.499 134.366,35.189 134.366,54.45 134.818,54.902 135.692,54.902 135.915,54.679 135.915,54.28 Opt-phi2-R.6 137.129,53.066 137.129,48.629 pad.13
PHI3: Opt-phi3-L.2 Opt-phi3-R.2 SPI.3 XIO.19 | length 266.9
  Top Layer w0.254: SPI.3 65.109,26.581 69.177,26.581 91.97,3.788 91.97,3.765 102.428,-6.693 102.451,-6.693 102.451,-13.399 104.242,-15.189 137.465,-15.189 141.58,-11.074 141.58,-7.551 141.803,-7.328 142.677,-7.328 ; Opt-phi3-L.2 142.9,-7.95 142.9,-7.551 142.677,-7.328 ; Opt-phi3-R.2 144.805,63.83 144.805,63.431 144.582,63.208 137.681,63.208 135.649,61.176 111.548,61.176 107.814,57.442 105.318,57.442 104.81,56.934 102.861,56.934 101.448,55.521 101.448,49.164 99.82,47.536 99.82,31.24 97.765,29.185 95.297,29.185 XIO.19 90.974,24.861 90.974,8.017 94.256,4.735 94.256,4.712 103.374,-4.407 103.398,-4.407 103.779,-4.788 105.629,-4.788 106.137,-5.296 140.645,-5.296 142.677,-7.328
PHI3-L: "CBCM IC.K9" Opt-phi3-L.6 pad.5 | length 52.3
  Top Layer w0.254: 125.73,20.32 125.73,21.038 124.171,22.597 124.171,23.266 123.596,23.841 122.784,23.841 122.209,23.266 122.209,22.454 122.784,21.879 123.018,21.879 124.241,20.656 124.241,17.882 125.394,16.729 126.347,16.729 127.219,15.857 127.219,14.904 128.118,14.005 131.784,14.005 133.851,11.938 139.312,11.938 141.58,9.67 141.58,1.201 141.803,0.978 143.947,0.978 144.17,1.201 144.17,1.6 Opt-phi3-L.6 144.114,2.876 144.114,7.886 pad.5
PHI3-R: "CBCM IC.L2" Opt-phi3-R.6 pad.14 | length 158
  Top Layer w0.254: 123.19,38.1 124.171,39.081 124.171,41.046 124.104,41.113 123.925,41.113 123.544,41.494 123.101,41.494 122.812,41.783 110.109,41.783 103.48,48.412 103.48,54.679 103.703,54.902 105.651,54.902 106.159,55.41 108.655,55.41 110.179,56.934 169.126,56.934 170.942,55.118 170.942,46.442 169.25,44.75 144.5,44.75 141.478,47.772 141.478,53.942 142.438,54.902 143.312,54.902 143.535,54.679 143.535,54.28 Opt-phi3-R.6 144.75,53.065 pad.14
RA_3.3: "CBCM IC.H1" "CBCM IC.J6" "Right analog power regulator (3.3V).4" C26.2 R7.1 | length 115.4
  Top Layer w0.508: 47.09,61.39 47.422,61.722 53.34,61.722 53.34,64.327 R7.1 ; C26.2 v3@54.495,62.865
  Bottom Layer w0.254: 130.81,40.64 131.191,40.64
  Bottom Layer w0.508: v3(54.61,62.865) 110.109,62.865 130.81,42.164 130.81,40.64 ; 128.27,27.94 134.62,34.29 134.62,38.481 133.731,39.37 132.461,39.37 131.191,40.64
RA_GND: "CBCM IC.J1" "CBCM IC.L1" "Right analog power regulator (3.3V).1" "Right analog power regulator (3.3V).3" "Right analog power regulator (3.3V).6" "Right CCO regulator.3" "Right CCO regulator.GND" C26.1 C28.1 C30.1 C31.1 R8.2 R12.2 tie2.0 tie5.1 | length 34.9
  Top Layer w0.508: 47.09,56.29 48.77,54.61 52.845,54.61 C28.1 54.165,55.931 54.165,57.975 v3(53.34,58.801) 53.34,59.17 52.82,59.69 ; C26.1 54.635,60.21 R8.2
  Top Layer w1: 50.292,59.69 52.82,59.69 C26.1
  Top Layer w1.016: 36.44,59.69 50.292,59.69
  Bottom Layer w0.254: C30.1 C30.1@106.859,38.266 ; 106.843,39.472 106.859,39.472
  other v2: 35,58 38,58 35,61.5 38,61.5
  other v4: 105.918,40.132
RCCO_1.85V: "CBCM IC.H2" "Right CCO regulator.1" C31.2 C32.1 R11.1 | length 25.7
  Bottom Layer w0.254: 106.843,40.792 110.065,40.792 110.815,41.542 112.141,41.542 C31.2 121.843,40.78 123.252,39.37 128.778,39.37 130.048,38.1 130.81,38.1
RD_3.3: "CBCM IC.J2" "Right digital power regulator (3.3V).4" C27.2 C34.1 C36.1 C38.1 C40.1 C42.1 C44.1 C46.1 C48.1 C49.1 Opt-G1-R.8 Opt-G2-R.8 Opt-G3-R.8 Opt-Nout-R.1 Opt-phi1-R.8 Opt-phi2-R.8 Opt-phi3-R.8 Opt-Sclk-R.8 Opt-Sin-R.8 R9.1 | length 48.6
  Top Layer w0.254: C27.2 C27.2@53.455,36.31 ; v1(104.14,50.8) 104.902,51.562 C49.1 104.267,52.59 Opt-Nout-R.1 ; v1(116.205,50.8) 115.57,51.435 C46.1 116.205,52.59 Opt-Sin-R.8 ; v1(123.825,50.8) 123.19,51.435 C48.1 123.825,52.59 Opt-Sclk-R.8 ; v1(131.445,50.8) 130.81,51.435 C34.1 131.445,52.59 Opt-phi1-R.8 ; v1(139.065,50.8) 138.43,51.435 C36.1 139.065,52.59 Opt-phi2-R.8 ; v1(146.685,50.8) 146.05,51.435 C38.1 146.685,52.59 Opt-phi3-R.8 ; v1(154.305,50.8) 153.67,51.435 C40.1 154.305,52.59 Opt-G1-R.8 ; v1(161.925,50.8) 161.29,51.435 C42.1 161.925,52.59 Opt-G2-R.8 ; v1(169.545,50.8) 168.91,51.435 C44.1 169.545,52.59 Opt-G3-R.8
  Top Layer w0.508: 47.09,35.99 53.34,35.99 53.34,38.927 R9.1 ; C27.2@53.455,36.31 v3(54.61,37.465)
SCLK: Opt-Sclk-L.2 Opt-Sclk-R.2 XIO.5 | length 118.2
  Top Layer w0.254: Opt-Sclk-L.2 120.04,-7.95 120.04,-7.551 119.309,-6.82 105.506,-6.82 104.998,-6.312 103.686,-6.312 102.924,-5.55 102.901,-5.55 93.113,4.239 93.113,4.262 89.408,7.966 89.408,41.076 XIO.5 95.399,47.066 97.195,47.066 99.924,49.795 99.924,56.152 102.23,58.458 104.178,58.458 104.686,58.966 107.183,58.966 110.916,62.7 121.214,62.7 121.945,63.431 121.945,63.83 Opt-Sclk-R.2
SCLK-L: "CBCM IC.K7" Opt-Sclk-L.6 pad.2 | length 33.1
  Top Layer w0.254: Opt-Sclk-L.6 121.92,1.811 122.753,0.978 123.627,0.978 123.85,1.201 123.85,5.563 118.872,10.541 118.872,20.648 122.573,24.349 124.679,24.349 125.73,25.4
SCLK-R: "CBCM IC.L5" Opt-Sclk-R.6 pad.11 | length 41.6
  Top Layer w0.254: pad.11 121.889,48.639 121.889,53.066 Opt-Sclk-R.6 121.285,54.069 120.452,54.902 119.578,54.902 119.355,54.679 119.355,47.395 123.732,43.018 124.175,43.018 124.556,42.637 126.557,42.637 127.573,41.621 128.676,41.621 129.321,40.976 129.321,37.246 126.076,34.001 125.324,34.001 124.749,33.426 124.749,32.039 123.19,30.48
SIN: Opt-Sin-L.2 Opt-Sin-R.2 XIO.3 | length 105.1
  Top Layer w0.254: Opt-Sin-L.2 112.42,-7.95 112.42,-7.551 112.197,-7.328 105.296,-7.328 104.788,-6.82 103.656,-6.82 102.767,-5.931 102.743,-5.931 92.732,4.081 92.732,4.104 88.9,7.936 88.9,43.108 XIO.3 95.399,49.606 98.882,49.606 99.416,50.14 99.416,56.362 102.019,58.966 103.968,58.966 104.476,59.474 106.972,59.474 110.706,63.208 114.102,63.208 114.325,63.431 114.325,63.83 Opt-Sin-R.2
SIN-L: "CBCM IC.L7" Opt-Sin-L.6 pad.1 | length 36.4
  Top Layer w0.254: pad.1 113.634,8.116 113.634,2.876 Opt-Sin-L.6 114.3,1.811 115.133,0.978 116.007,0.978 116.23,1.201 116.23,18.725 122.363,24.857 122.647,24.857 123.19,25.4
SIN-R: "CBCM IC.K6" Opt-Sin-R.6 pad.10 | length 47.4
  Top Layer w0.254: pad.10 114.269,48.519 114.269,53.066 Opt-Sin-R.6 114.275,54.28 114.275,54.679 114.498,54.902 116.642,54.902 118.237,53.307 118.237,47.435 123.416,42.256 123.859,42.256 124.24,41.875 125.725,41.875 125.979,41.621 126.136,41.621 126.711,41.046 126.711,40.234 126.136,39.659 125.902,39.659 124.171,37.928 124.171,37.694 123.596,37.119 123.362,37.119 121.285,35.042 121.285,29.845 122.209,28.921 124.749,28.921 125.73,27.94
UC_3.3: C8.1 C10.1 C12.1 C14.1 C16.1 C18.1 C20.1 C22.1 C25.1 C33.1 C35.1 C37.1 C39.1 C41.1 C43.1 C45.1 C47.1 C50.1 Opt-G1-L.1 Opt-G1-R.1 Opt-G2-L.1 Opt-G2-R.1 Opt-G3-L.1 Opt-G3-R.1 Opt-Nout-L.8 Opt-Nout-R.8 Opt-phi1-L.1 Opt-phi1-R.1 Opt-phi2-L.1 Opt-phi2-R.1 Opt-phi3-L.1 Opt-phi3-R.1 Opt-Sclk-L.1 Opt-Sclk-R.1 Opt-Sin-L.1 Opt-Sin-R.1 POWER.4 | length 387
  Top Layer w0.254: v1(104.14,67.31) 104.775,66.675 C50.1 104.267,65.647 Opt-Nout-R.8 ; v1(107.95,-11.43) 107.315,-10.795 C25.1 107.95,-9.64 Opt-Nout-L.8 ; v1(111.76,-11.43) 112.395,-10.795 C20.1 111.76,-9.64 Opt-Sin-L.1 ; Opt-Sin-R.1 116.205,65.52 C45.1 115.57,66.675 v1(116.205,67.31) ; v1(119.38,-11.43) 120.015,-10.795 C22.1 119.38,-9.64 Opt-Sclk-L.1 ; Opt-Sclk-R.1 123.825,65.52 C47.1 123.19,66.675 v1(123.825,67.31) ; v1(127,-11.43) 127.635,-10.795 C8.1 127,-9.64 Opt-phi1-L.1 ; Opt-phi1-R.1 131.445,65.52 C33.1 130.81,66.675 v1(131.445,67.31) ; v1(134.62,-11.43) 135.255,-10.795 C10.1 134.62,-9.64 Opt-phi2-L.1 ; Opt-phi2-R.1 139.065,65.52 C35.1 138.43,66.675 v1(139.065,67.31) ; v1(142.24,-11.43) 142.875,-10.795 C12.1 142.24,-9.64 Opt-phi3-L.1 ; Opt-phi3-R.1 146.685,65.52 C37.1 146.05,66.675 v1(146.685,67.31) ; v1(149.86,-11.43) 150.495,-10.795 C14.1 149.86,-9.64 Opt-G1-L.1 ; Opt-G1-R.1 154.305,65.52 C39.1 153.67,66.675 v1(154.305,67.31) ; v1(157.48,-11.43) 158.115,-10.795 C16.1 157.48,-9.64 Opt-G2-L.1 ; Opt-G2-R.1 161.925,65.52 C41.1 161.29,66.675 v1(161.925,67.31) ; v1(165.1,-11.43) 165.735,-10.795 C18.1 165.1,-9.64 Opt-G3-L.1 ; Opt-G3-R.1 169.545,65.52 C43.1 168.91,66.675 v1(169.545,67.31)
  Bottom Layer w0.254: POWER.4 50.415,-12.192 107.188,-12.192 ; v1(104.14,67.31) 105.41,68.58 114.935,68.58 ; v1(107.95,-11.43) 107.188,-12.192 ; v1(111.76,-11.43) 111.76,-11.557 111.125,-12.192 ; v1(116.205,67.31) 114.935,68.58 ; v1(119.38,-11.43) 118.618,-12.192 ; v1(123.825,67.31) 122.555,68.58 ; 126.365,-12.192 133.858,-12.192 ; v1(127,-11.43) 126.238,-12.192 118.618,-12.192 ; v1(131.445,67.31) 130.175,68.58 ; v1(134.62,-11.43) 133.858,-12.192 ; v1(139.065,67.31) 137.795,68.58 ; v1(142.24,-11.43) 141.478,-12.192 ; v1(146.685,67.31) 145.415,68.58 ; v1(149.86,-11.43) 149.098,-12.192 ; v1(154.305,67.31) 153.035,68.58 ; v1(157.48,-11.43) 156.718,-12.192 ; v1(161.925,67.31) 160.655,68.58 ; 164.465,-12.065 v1(165.1,-11.43) ; 107.188,-12.192 111.125,-12.192 ; 111.125,-12.192 118.618,-12.192 ; 114.935,68.58 122.555,68.58 ; 122.555,68.58 130.175,68.58 ; 130.175,68.58 137.795,68.58 ; 133.858,-12.192 141.478,-12.192 ; 137.795,68.58 145.415,68.58 ; 141.478,-12.192 149.098,-12.192 ; 145.415,68.58 153.035,68.58 ; 149.098,-12.192 156.718,-12.192 ; 153.035,68.58 160.655,68.58 ; 156.718,-12.192 169.046,-12.192 175.75,-5.488 175.75,61.105 v1(169.545,67.31) 168.275,68.58 160.655,68.58
UC_GND: C8.2 C10.2 C12.2 C14.2 C16.2 C18.2 C20.2 C22.2 C25.2 C33.2 C35.2 C37.2 C39.2 C41.2 C43.2 C45.2 C47.2 C50.2 Opt-G1-L.4 Opt-G1-R.4 Opt-G2-L.4 Opt-G2-R.4 Opt-G3-L.4 Opt-G3-R.4 Opt-Nout-L.5 Opt-Nout-R.5 Opt-phi1-L.4 Opt-phi1-R.4 Opt-phi2-L.4 Opt-phi2-R.4 Opt-phi3-L.4 Opt-phi3-R.4 Opt-Sclk-L.4 Opt-Sclk-R.4 Opt-Sin-L.4 Opt-Sin-R.4 POWER.6 POWER.7 SPI.6 XIO.35 XIO.36 | length 372.3
  Top Layer w0.254: v1(104.14,-11.43) 104.775,-10.795 C25.2 104.14,-9.64 Opt-Nout-L.5 ; v1(107.95,67.31) 107.315,66.675 C50.2 108.077,65.393 Opt-Nout-R.5 ; Opt-Sin-R.4 112.395,65.52 C45.2 113.03,66.675 v1(112.395,67.31) ; v1(115.57,-11.43) 114.935,-10.795 C20.2 115.57,-9.64 Opt-Sin-L.4 ; Opt-Sclk-R.4 120.015,65.52 C47.2 120.65,66.675 v1(120.015,67.31) ; v1(123.19,-11.43) 122.555,-10.795 C22.2 123.19,-9.64 Opt-Sclk-L.4 ; Opt-phi1-R.4 127.635,65.52 C33.2 128.27,66.675 v1(127.635,67.31) ; v1(130.81,-11.43) 130.175,-10.795 C8.2 130.81,-9.64 Opt-phi1-L.4 ; Opt-phi2-R.4 135.255,65.52 C35.2 135.89,66.675 v1(135.255,67.31) ; v1(138.43,-11.43) 137.795,-10.795 C10.2 138.43,-9.64 Opt-phi2-L.4 ; Opt-phi3-R.4 142.875,65.52 C37.2 143.51,66.675 v1(142.875,67.31) ; v1(146.05,-11.43) 145.415,-10.795 C12.2 146.05,-9.64 Opt-phi3-L.4 ; Opt-G1-R.4 150.495,65.52 C39.2 151.13,66.675 v1(150.495,67.31) ; v1(153.67,-11.43) 153.035,-10.795 C14.2 153.67,-9.64 Opt-G1-L.4 ; Opt-G2-R.4 158.115,65.52 C41.2 158.75,66.675 v1(158.115,67.31) ; v1(161.29,-11.43) 160.655,-10.795 C16.2 161.29,-9.64 Opt-G2-L.4 ; Opt-G3-R.4 165.735,65.52 C43.2 166.37,66.675 v1(165.735,67.31) ; v1(168.91,-11.43) 168.275,-10.795 C18.2 168.91,-9.64 Opt-G3-L.4
  Bottom Layer w0.254: POWER.7 52.451,-6.608 52.451,-7.353 56.528,-11.43 v1(104.14,-11.43) 104.902,-10.668 114.808,-10.668 ; v1(107.95,67.31) 109.474,65.786 113.919,65.786 ; v1(112.395,67.31) 113.919,65.786 ; v1(115.57,-11.43) 114.808,-10.668 ; v1(120.015,67.31) 121.539,65.786 ; v1(123.19,-11.43) 122.428,-10.668 ; v1(127.635,67.31) 129.159,65.786 ; v1(130.81,-11.43) 130.048,-10.668 ; v1(135.255,67.31) 136.779,65.786 ; v1(138.43,-11.43) 137.668,-10.668 ; v1(142.875,67.31) 144.399,65.786 ; v1(146.05,-11.43) 145.288,-10.668 ; v1(150.495,67.31) 152.019,65.786 ; v1(153.67,-11.43) 152.908,-10.668 ; v1(158.115,67.31) 159.639,65.786 ; v1(161.29,-11.43) 160.528,-10.668 ; v1(165.735,67.31) 172.5,60.545 172.5,-7.84 v1(168.91,-11.43) ; 167.259,65.786 159.639,65.786 ; v1@168.75,-11.27 168.148,-10.668 160.528,-10.668 ; 113.919,65.786 121.539,65.786 ; 114.808,-10.668 122.428,-10.668 ; 121.539,65.786 129.159,65.786 ; 122.428,-10.668 130.048,-10.668 ; 129.159,65.786 136.779,65.786 ; 130.048,-10.668 137.668,-10.668 ; 136.779,65.786 144.399,65.786 ; 137.668,-10.668 145.288,-10.668 ; 144.399,65.786 152.019,65.786 ; 145.288,-10.668 152.908,-10.668 ; 152.019,65.786 159.639,65.786 ; 152.908,-10.668 160.528,-10.668
pads on no net: "CBCM IC.A1" "CBCM IC.A2" "CBCM IC.A3" "CBCM IC.A4" "CBCM IC.A5" "CBCM IC.A6" "CBCM IC.A7" "CBCM IC.A8" "CBCM IC.A9" "CBCM IC.A10" "CBCM IC.A11" "CBCM IC.B1" "CBCM IC.B2" "CBCM IC.B3" "CBCM IC.B4" "CBCM IC.B5" "CBCM IC.B6" "CBCM IC.B7" "CBCM IC.B8" "CBCM IC.B9" "CBCM IC.B10" "CBCM IC.B11" "CBCM IC.C1" "CBCM IC.C2" "CBCM IC.C3" "CBCM IC.C5" "CBCM IC.C6" "CBCM IC.C7" "CBCM IC.C10" "CBCM IC.C11" "CBCM IC.D1" "CBCM IC.D2" "CBCM IC.D10" "CBCM IC.D11" "CBCM IC.E1" "CBCM IC.E2" "CBCM IC.E3" "CBCM IC.E9" "CBCM IC.E10" "CBCM IC.E11" "CBCM IC.F1" "CBCM IC.F2" "CBCM IC.F3" "CBCM IC.F9" "CBCM IC.F10" "CBCM IC.F11" "CBCM IC.G1" "CBCM IC.G2" "CBCM IC.G3" "CBCM IC.G9" "CBCM IC.G10" "CBCM IC.G11" "CBCM IC.K2" "CBCM IC.K3" "CBCM IC.L11" "Left CCO regulator.5" "Right CCO regulator.5" Opt-G1-L.3 Opt-G1-L.7 Opt-G1-R.3 Opt-G1-R.7 Opt-G2-L.3 Opt-G2-L.7 Opt-G2-R.3 Opt-G2-R.7 Opt-G3-L.3 Opt-G3-L.7 Opt-G3-R.3 Opt-G3-R.7 Opt-Nout-L.3 Opt-Nout-L.7 Opt-Nout-R.3 Opt-Nout-R.7 Opt-phi1-L.3 Opt-phi1-L.7 Opt-phi1-R.3 Opt-phi1-R.7 Opt-phi2-L.3 Opt-phi2-L.7 Opt-phi2-R.3 Opt-phi2-R.7 Opt-phi3-L.3 Opt-phi3-L.7 Opt-phi3-R.3 Opt-phi3-R.7 Opt-Sclk-L.3 Opt-Sclk-L.7 Opt-Sclk-R.3 Opt-Sclk-R.7 Opt-Sin-L.3 Opt-Sin-L.7 Opt-Sin-R.3 Opt-Sin-R.7 SPI.1 SPI.2 SPI.5

## Polygon pours and split planes (outlines as drawn)
RD_3.3 on Power "RD_3.3" (solid, pour order 11): 17.145,28.575 179.07,28.575 179.07,69.215 17.145,69.215
LD_3.3 on Power "LD_3.3" (solid, pour order 9): 17.145,27.94 179.07,27.94 179.07,-17.78 17.145,-17.78
D_GND on Ground "D_GND" (solid, pour order 13): 17.157,-17.78 179.082,-17.78 179.082,69.215 17.157,69.215
LA_GND on Bottom Layer "LA_GND" (solid, pour order 15): 17.145,27.94 179.07,27.94 179.07,-17.78 17.145,-17.78
RA_GND on Bottom Layer "RA_GND" (solid, pour order 10): 17.145,28.575 17.145,69.215 178.943,69.215 179.07,69.088 179.07,28.575

## Silkscreen, mask and mechanical layers (free items; w line width, h text height)
Top Overlay:
  text "BioSA Lab" at 164.211,13.843 h3.05 r90
  text "EECS,LAS,YorkU" at 168.275,13.335 h2.03 r90
Mechanical 1:
  the board outline again, w0.254